# Altium PCB PCB.PcbDoc
Units mm, origin at the board's own origin, x right, y up, seen from the top; angles counter-clockwise.
Board outline 26.67 x 42.25 mm, 2 copper layers (Top Layer, Bottom Layer); 15 components, 30 nets, 111 pads, 44 vias.
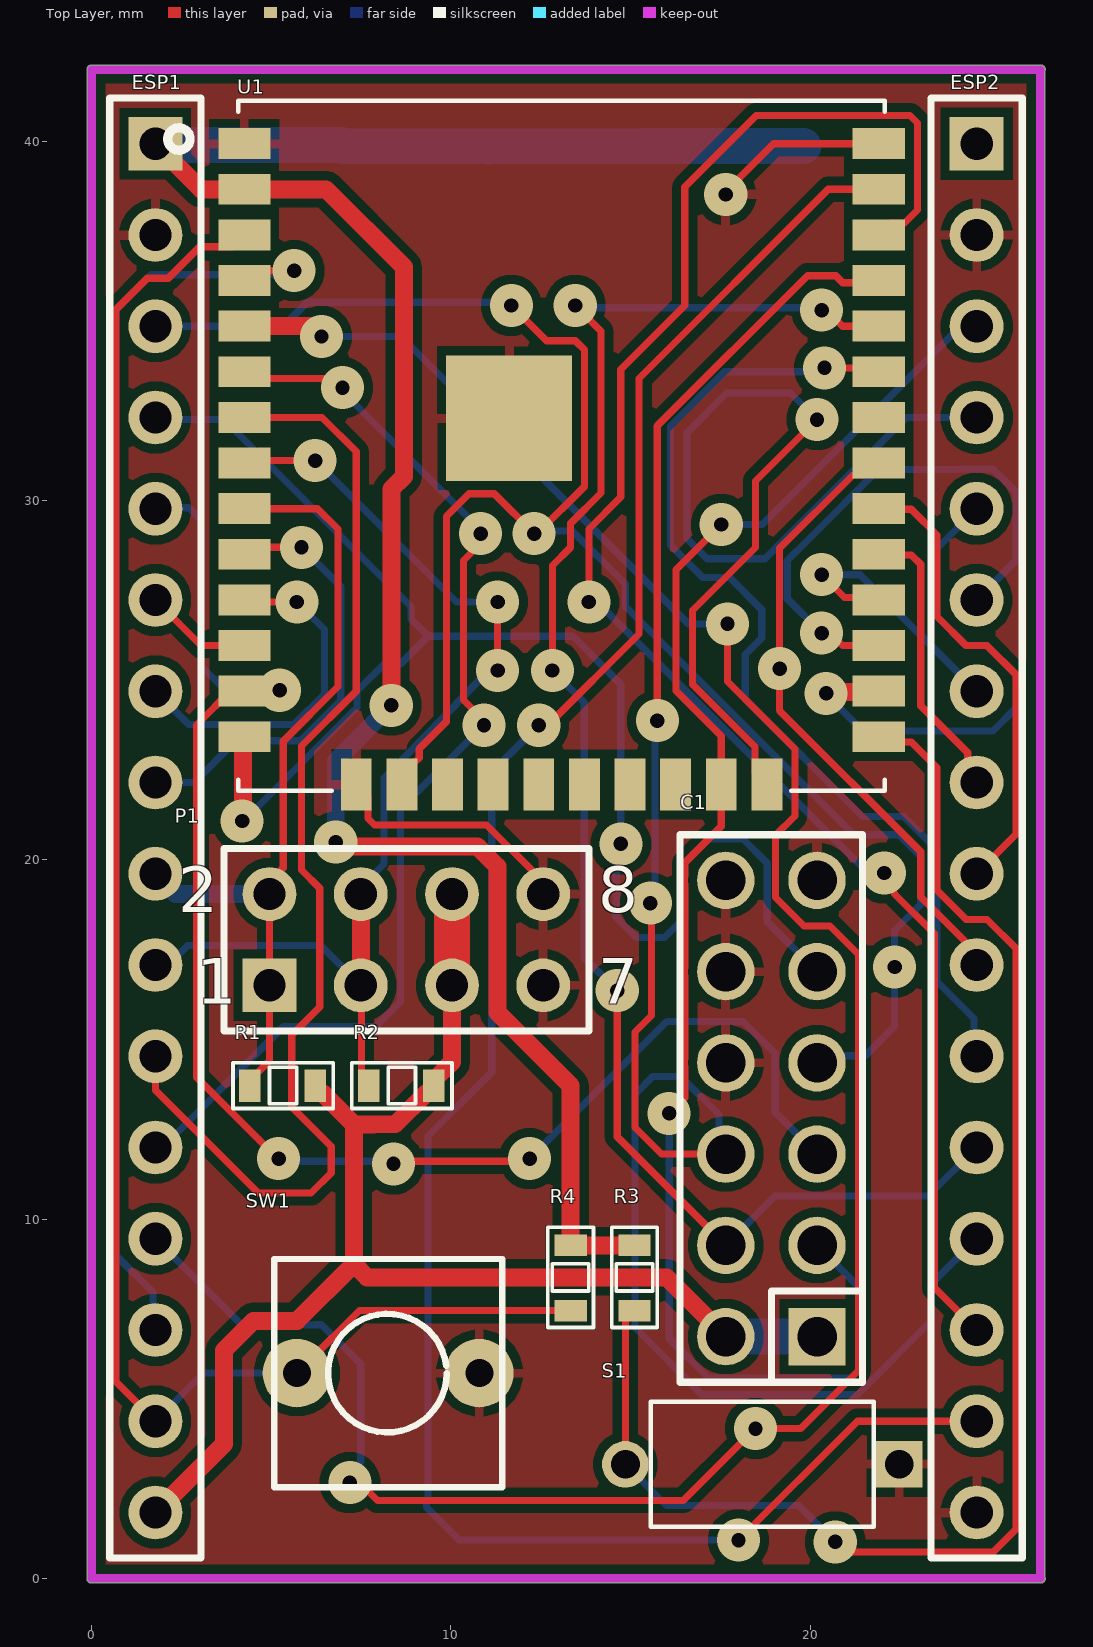
[diagram p0: Top Layer view]
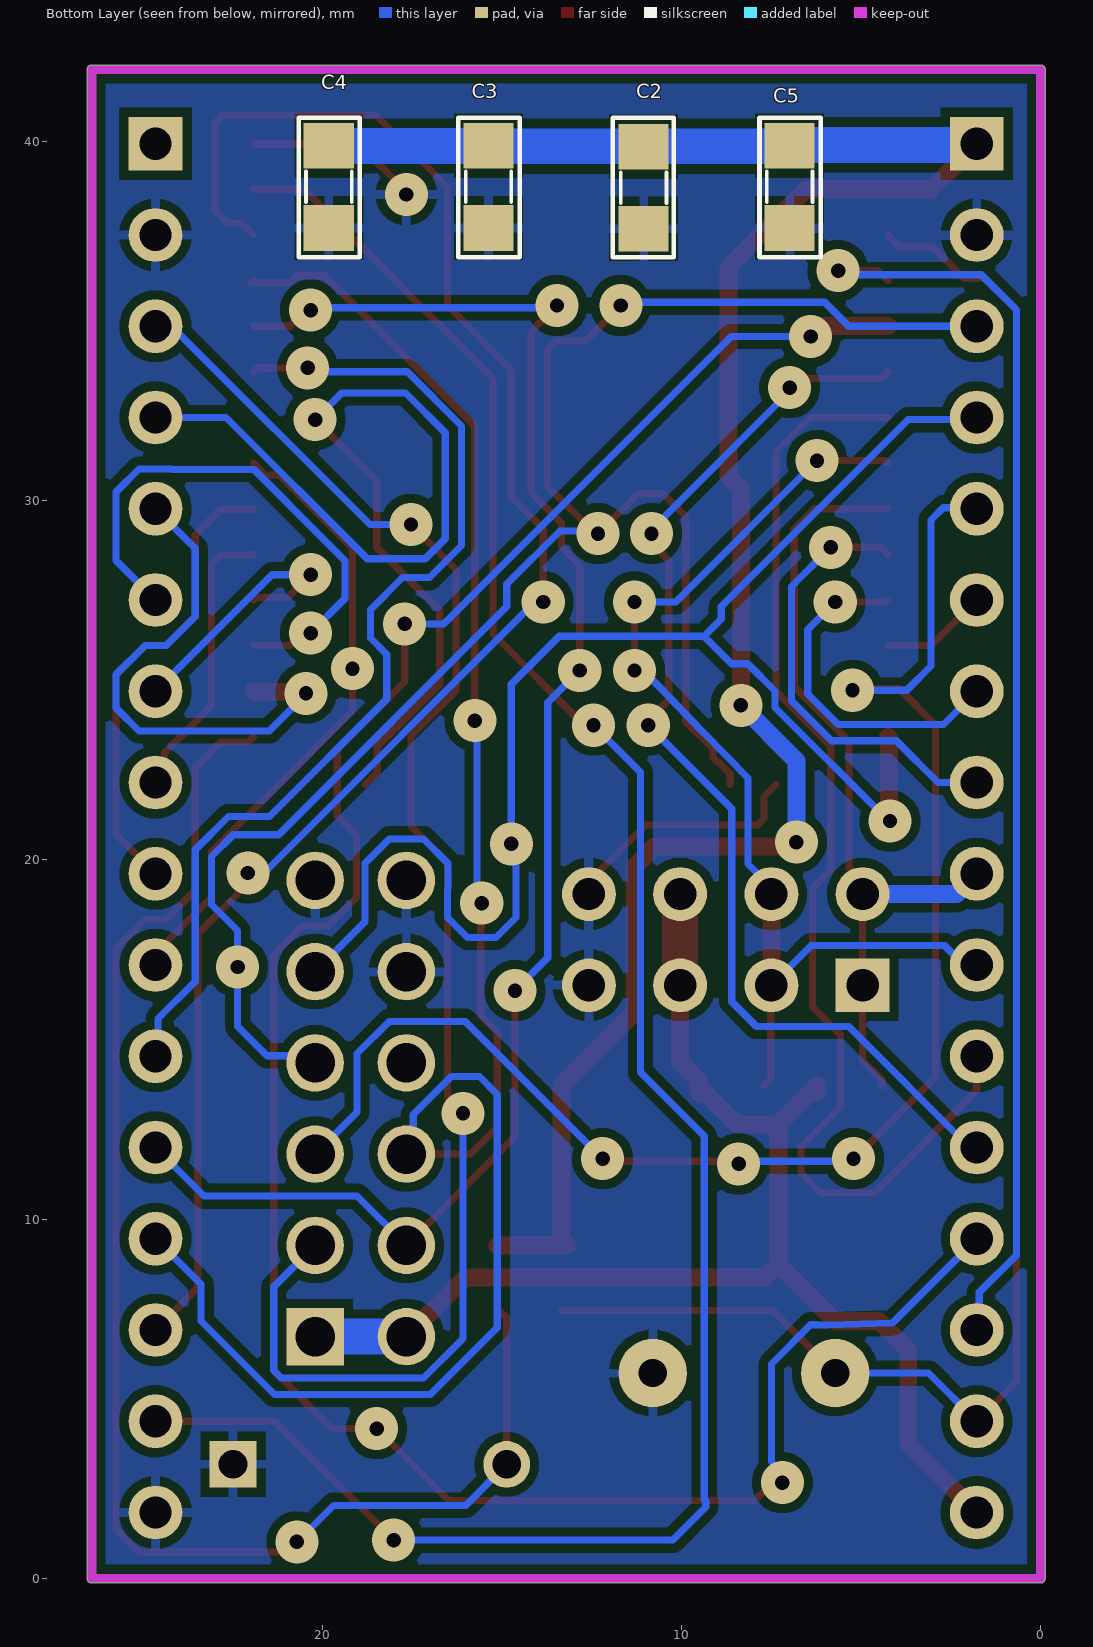
[diagram p1: Bottom Layer view, seen from below]
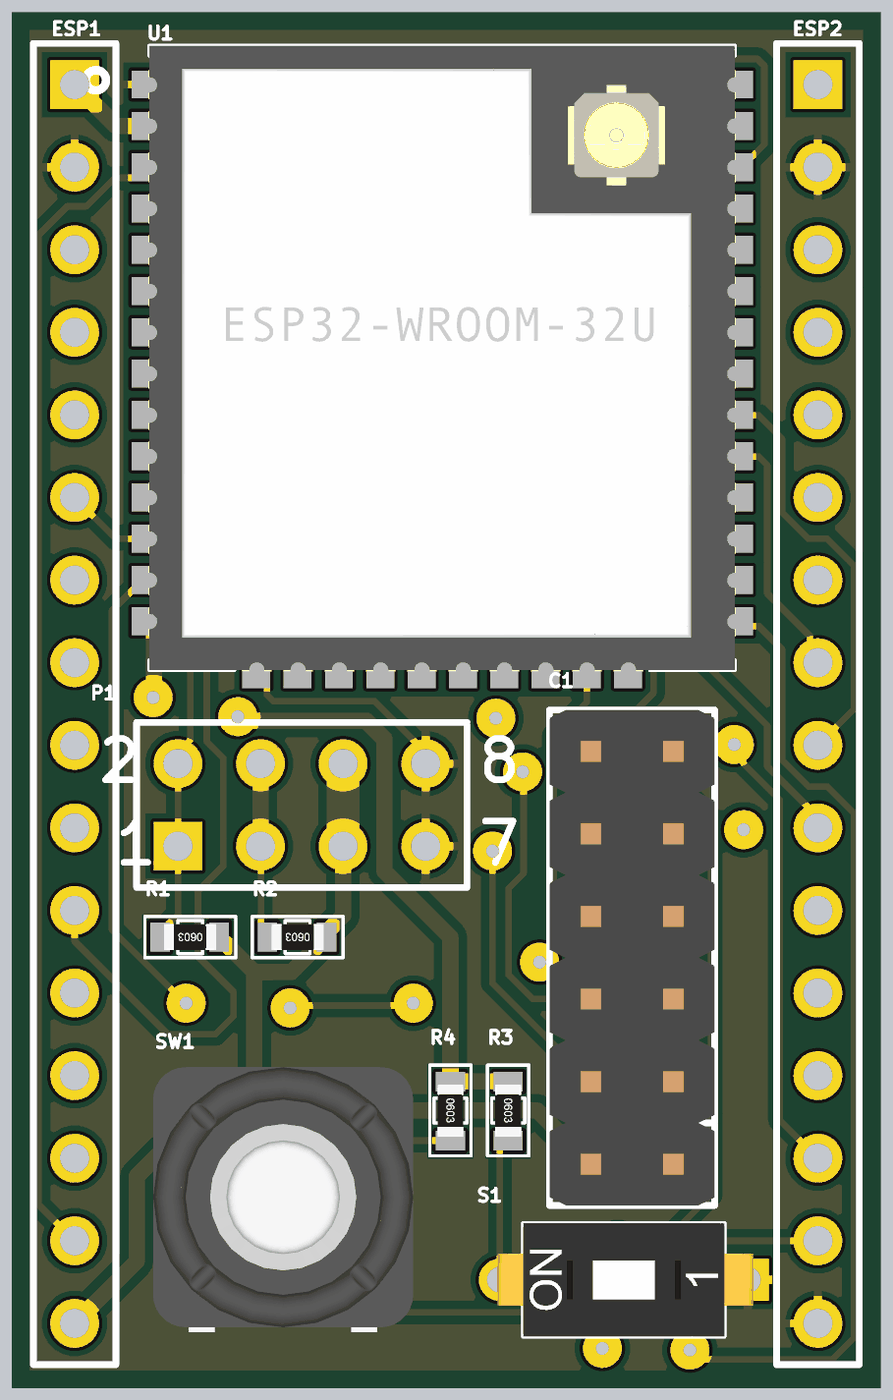
[diagram p2: 3D render of the assembled board from above, using the file's embedded part models]
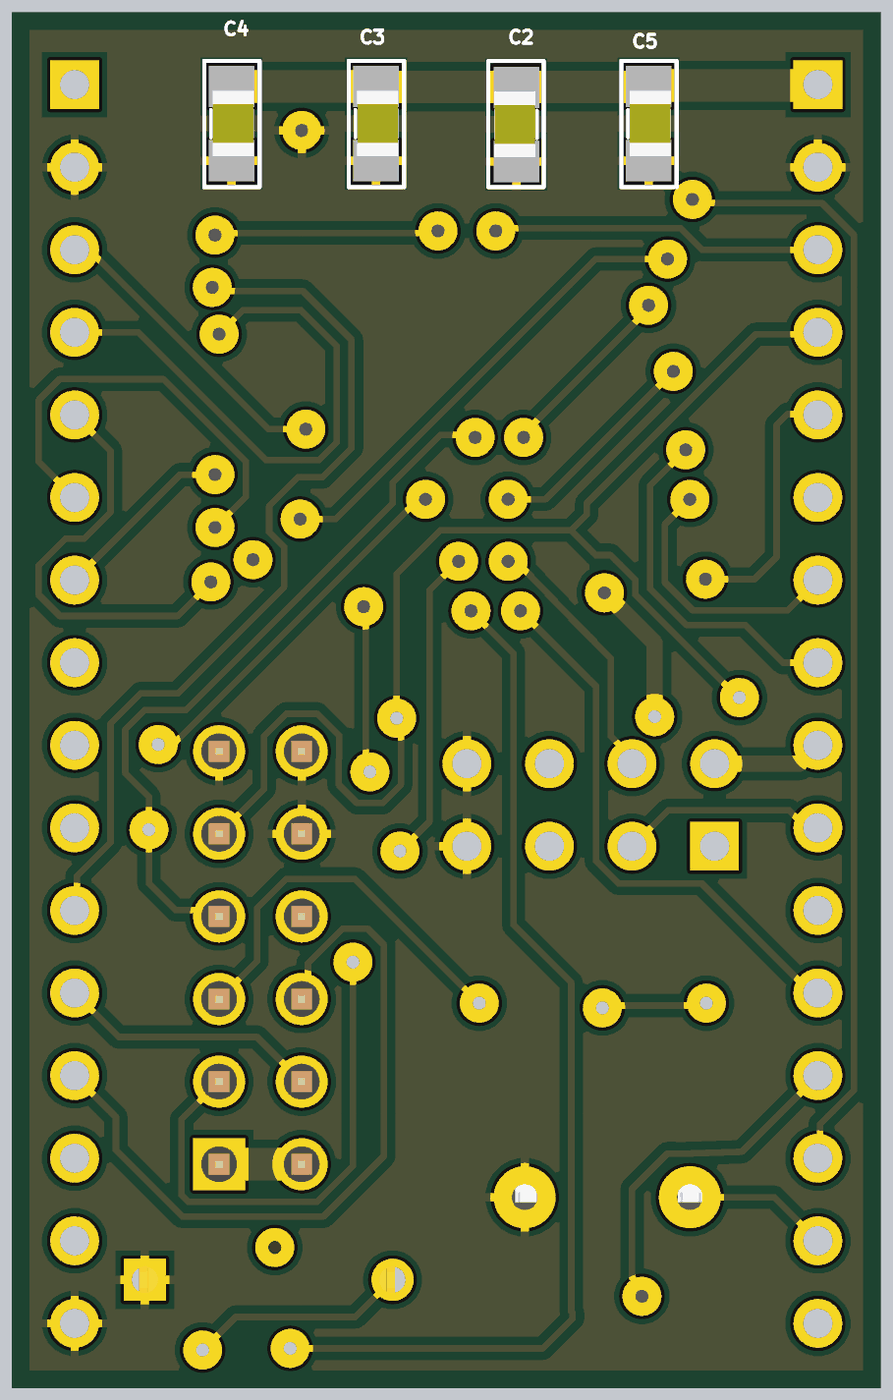
[diagram p3: 3D render of the assembled board from below, using the file's embedded part models]

## Layer stack, top to bottom
Top Solder: solder mask 0.0102, Solder Resist, Dk 3.5
Top Layer: signal copper 0.0356
Dielectric 1: dielectric 0.32, FR-4, Dk 4.8
Bottom Layer: signal copper 0.0356
Bottom Solder: solder mask 0.0102, Solder Resist, Dk 3.5

## Board outline
-0.127,0 ccw(c0,0) 0,-0.127 26.416,-0.127 ccw(c26.416,0) 26.543,0 ccw(c26.416,0) 26.539,0.032 26.539,41.968 ccw(c26.416,42) 26.543,42 ccw(c26.416,42) 26.416,42.127 0,42.127 ccw(c0,42) -0.127,42

## Design rules (kind name [scope] priority, off if disabled: settings)
Clearance [All] p1: gap=0.5 ignorepadtopadclearanceinfootprint=FALSE
PolygonConnect [All] p1: connectstyle=Relief reliefconductorwidth=0.254 reliefentries=4 polygonreliefangle="90 Angle" airgapwidth=0.254
RoutingVias [All] p1: holewidth=0.4 width=1.2 viastyle="Through Hole" minholewidth=0.4 minwidth=1.2 maxholewidth=0.4 maxwidth=1.2
SolderMaskExpansion [All] p1: expansion=0.102 istentingtop=FALSE
Width [All] p1: maxlimit=1 minlimit=0.2 preferedwidth=0.5
30 further rules are at their usual default settings.

## Components (designator, comment, footprint, x,y, rotation, side; value= is the part's Value field where it differs from the comment)
C1 "JP6x2" JP6-D2T 18.923,13.081 r90 top
C2 "103" SM-0805 11.049,38.71 r270 bottom
C3 "103" SM-0805 15.367,38.735 r90 bottom
C4 "103" SM-0805 19.812,38.735 r90 bottom
C5 "103" SM-0805 6.985,38.735 r90 bottom
ESP1 "Header 16" HDR1X16 1.777,39.935 r270 top
ESP2 "Header 16" HDR1X16 24.637,39.935 r270 top
P1 "Header 4X2" HDR2X4 4.953,16.51 r0 top
R1 "Res" RES-SMD-0603 5.334,13.716 r180 top
R2 "Res" RES-SMD-0603 8.636,13.716 r180 top
R3 "Res" RES-SMD-0603 15.113,8.382 r270 top
R4 "Res" RES-SMD-0603 13.335,8.382 r270 top
S1 "" SW-DIP1 18.669,3.175 r90 top
SW1 "SW" SW2 5.715,5.715 r0 top value="SW chip 2 pin"
U1 "ESP32-WROOM-32U" ESP32-WROOM-32U 13.081,31.528 r0 top

## Footprints (in the part's own frame and the unit in brackets; to place one, negate y for a bottom-side part, rotate by r counter-clockwise, add the part's x,y. Pads: shape width x height; smd on the part's side, far side on the other; paste and mask are expansions set on the pad)
ESP32-WROOM-32U [mm]
  rect 1.45x0.86 smd: 1(-8.83,8.41) 2(-8.83,7.14) 3(-8.83,5.87) 4(-8.83,4.6) 5(-8.83,3.33) 6(-8.83,2.06) 7(-8.83,0.79) 8(-8.83,-0.48) 9(-8.83,-1.75) 10(-8.83,-3.02) 11(-8.83,-4.29) 12(-8.83,-5.56) 13(-8.83,-6.83) 14(-8.83,-8.1) 25(8.83,-8.1) 26(8.83,-6.83) 27(8.83,-5.56) 28(8.83,-4.29) 29(8.83,-3.02) 30(8.83,-1.75) 31(8.83,-0.48) 32(8.83,0.79) 33(8.83,2.06) 34(8.83,3.33) 35(8.83,4.6) 36(8.83,5.87) 37(8.83,7.14) 38(8.83,8.41)
  rect 0.86x1.45 smd: 15(-5.715,-9.43) 16(-4.445,-9.43) 17(-3.175,-9.43) 18(-1.905,-9.43) 19(-0.635,-9.43) 20(0.635,-9.43) 21(1.905,-9.43) 22(3.175,-9.43) 23(4.445,-9.43) 24(5.715,-9.43)
  rect 3.5x3.5 smd: 39(-1.46,0.77)
  silkscreen extent -10.96,-9.6 9,9.6, body extent -9.03,-9.64 9.04,9.6, height 3.4
HDR1X16 [mm] "Connector; Header; 16 Position"
  rect 1.5x1.5 hole 0.9: 1(0,0)
  round 1.5 hole 0.9: 2(2.54,0) 3(5.08,0) 4(7.62,0) 5(10.16,0) 6(12.7,0) 7(15.24,0) 8(17.78,0) 9(20.32,0) 10(22.86,0) 11(25.4,0) 12(27.94,0) 13(30.48,0) 14(33.02,0) 15(35.56,0) 16(38.1,0)
  silkscreen extent -1.27,-1.27 39.37,1.27, body extent -1.27,-1.27 39.37,1.27, height 7
HDR2X4 [mm] "Connector; Header; 4x2 Position"
  rect 1.5x1.5 hole 0.9: 1(0,0)
  round 1.5 hole 0.9: 2(0,2.54) 3(2.54,0) 4(2.54,2.54) 5(5.08,0) 6(5.08,2.54) 7(7.62,0) 8(7.62,2.54)
  silkscreen extent -1.27,-1.27 8.89,3.81, body extent -1.27,-1.27 8.89,3.81, height 7
JP6-D2T [mm] "12 pins, dual pin, straight, gold plating"
  rect 1.6x1.6 hole 1.1: 1(-6.35,-1.27)
  round 1.6 hole 1.1: 2(-3.81,-1.27) 3(-1.27,-1.27) 4(1.27,-1.27) 5(3.81,-1.27) 6(6.35,-1.27) 7(6.35,1.27) 8(3.81,1.27) 9(1.27,1.27) 10(-1.27,1.27) 11(-3.81,1.27) 12(-6.35,1.27)
  silkscreen extent -7.62,-2.54 7.62,2.54, body extent -7.62,-2.54 7.62,2.54, height 8.55
RES-SMD-0603 [mm]
  rect 0.6x0.9 smd: 1(-0.889,0) 2(0.927,0)
  silkscreen extent -1.4,-0.64 1.4,0.64, body extent -0.8,-0.4 0.8,0.4, height 0.43
SM-0805 [mil] "Compoment SMD 80x50mil"
  rect 50x55 smd: 1(-45,0) 2(45,0)
  silkscreen extent -77,-34 76,33, body extent -40,-27 40,23, height 24
SW2 [mil] "SW button 2pin, 250x 250 mil"
  round 75 hole 31: 1(0,0) 2(200,0)
  silkscreen extent -25,-125 225,125, body extent -60,-163 255,157, height 257
SW-DIP1 [mm]
  rect 1.3x1.3 hole 0.8: 1(0,-3.81)
  round 1.3 hole 0.8: 2(0,3.81)
  silkscreen extent -1.74,-3.1 1.74,3.1, body extent -1.74,-3.98 1.74,3.89, height 3.95

## Part data
C1: "WR-PHD 2.54 mm Dual Socket Header", Manufacturer="W¨¹rth Elektronik eiSos GmbH", partNo=61301221821, ComponentLink1 Description=Manufacturer, ComponentLink1URL=http://www.we-online.com, ComponentLink2 Description=Datasheet, ComponentLink2URL=http://katalog.we-online.de/em/datasheet/6130xx21821.pdf, Created by="Karrer Zheng", Created Date="29 March 2013", NoPins=12
C2 C3 C4 C5: library part CM, "Cap SMD"
ESP1 ESP2: "Header, 16-Pin", LatestRevisionDate=17-Jul-2002, LatestRevisionNote="Re-released for DXP Platform.", Publisher="Altium Limited"
P1: "Header, 4-Pin, Dual row", LatestRevisionDate=17-Jul-2002, LatestRevisionNote="Re-released for DXP Platform.", Publisher="Altium Limited"
R1 R2 R3 R4: library part Res-SMD, "Resistor", Manufacturer="Generic Components", Class=Passive, Published=08/06/2000, Publisher="Altium Hobart Technology Centre"
S1: library part SWDIP1, "WS-DITV 2.54 mm small compact THT flat actuator with top tape", Manufacturer="Wurth Elektronik", Part No.=418127160901, ComponentLink1 Description=Manufacturer, ComponentLink1URL=http://www.we-online.com, ComponentLink2 Description=Datasheet, ComponentLink2URL=http://katalog.we-online.de/em/datasheet/4181271609xx.pdf, Created by="Baojun Chen", Created Date=Dec.2015, Pole=01
SW1: library part SW2, "Switch button 2 pin"
U1: "Wi-Fi/BT BLE Module ESP32-D0WD", MFR=Espressif, Category=MODULE, MPN=ESP32-WROOM-32U, PinCount=40, Price=None, Solder=SMT

## Via types
v1: diameter 1.2, hole 0.4, Top Layer to Bottom Layer, 44 vias

## Nets (pads, with @x,y where several pads share a name; then routed paths per layer and width w, separated by ;. In a path a pad name is that pad's centre, name@x,y a point inside that pad or via, vN(x,y) a via of type N, cw(c..) or ccw(c..) an arc to the next point about the centre after c; other vN are vias at no path point)
"Door1 sensor": ESP1.12 U1.6 | length 31.5
  Top Layer w0.2: U1.6 4.438,33.401 6.46,33.401 6.714,33.147 v1(6.985,33.147) ; v1(10.829,29.083) 10.829,28.812 10.349,28.332 10.349,24.449 10.922,23.876 v1(10.922,23.749)
  Bottom Layer w0.2: ESP1.12 1.976,11.995 5.348,15.367 7.911,15.367 8.597,16.053 8.597,21.424 v1(10.922,23.749) ; v1(6.985,33.147) 6.985,33.037 10.829,29.193 v1(10.829,29.083)
"Door2 sensor": ESP1.11 U1.7 | length 32.5
  Top Layer w0.2: ESP1.11 1.777,13.59 4.637,10.73 6.11,10.73 6.669,11.289 6.669,12.019 5.569,13.119 5.569,15.125 6.35,15.906 6.35,19.214 5.842,19.722 5.842,23.172 7.366,24.696 7.366,31.369 6.417,32.318 U1.7
GND: C1.6 C1.7 C1.8 C1.9 C2.2 C3.1 C4.1 C5.1 ESP1.2 ESP2.2 ESP2.16 P1.7 P1.8 S1.1 SW1.2 U1.1 U1.15 U1.38 U1.39 | length 11.9
  Top Layer w0.2: U1.15 7.696,21.768 7.696,21.153 7.874,20.975 10.994,20.975 12.573,19.396 P1.8 ; v1(17.653,38.524) 17.653,38.608 18.983,39.938 U1.38
"HSPI CLK": C1.3 ESP1.5 U1.13 | length 42.9
  Top Layer w0.2: v1(5.207,11.684) 5.188,11.684 2.921,13.951 2.921,23.754 3.932,24.765 5.192,24.765 v1(5.234,24.724) ; v1(8.405,11.538) 8.478,11.611 12.119,11.611 v1(12.192,11.684)
  Bottom Layer w0.2: ESP1.5 1.804,29.802 2.71,29.802 3.048,29.464 3.048,25.4 3.724,24.724 v1(5.234,24.724) ; v1(5.207,11.684) 5.28,11.611 8.332,11.611 v1(8.405,11.538) ; v1(12.192,11.684) 16.013,15.505 18.131,15.505 19.028,14.608 19.028,12.976 C1.3
"HSPI CS": C1.2 ESP2.3 U1.23 | length 43.5
  Top Layer w0.2: v1(16.078,12.945) 16.51,13.376 16.51,14.192 cw(c17.653,14.351) 16.51,14.51 16.51,16.732 cw(c17.653,16.891) 16.51,17.05 16.51,19.272 cw(c17.653,19.431) 16.51,19.59 16.51,19.92 17.526,20.936 U1.23 17.526,23.447 16.272,24.701 16.272,28.083 v1(17.526,29.337)
  Bottom Layer w0.2: v1(16.078,12.945) 16.078,6.674 17.175,5.577 21.14,5.577 21.347,5.784 21.347,8.117 C1.2 ; v1(17.526,29.337) 18.669,29.337 23.938,34.606 24.388,34.606 ESP2.3
"HSPI MISO": C1.5 ESP1.4 U1.14 | length 43.1
  Top Layer w0.5: v1(4.191,21.082) 4.221,21.112 4.221,23.398 U1.14
  Bottom Layer w0.2: ESP1.4 1.834,32.258 3.683,32.258 8.89,27.051 8.89,26.707 9.37,26.227 ; v1(4.191,21.082) 4.225,21.082 7.389,24.246 7.389,24.699 8.153,25.463 8.606,25.463 9.37,26.227 ; C1.5 18.807,18.277 18.807,19.909 18.131,20.585 17.175,20.585 16.499,19.909 16.499,19.202 16.51,19.191 16.51,18.401 15.951,17.842 15.161,17.842 14.602,18.401 14.602,20.317 v1(14.732,20.447) 14.732,24.892 13.397,26.227 9.37,26.227
"HSPI MOSI": C1.4 ESP1.3 U1.16 | length 52.2
  Top Layer w0.2: U1.16 8.636,22.393 8.966,22.723 9.005,22.723 9.122,22.84 9.122,23.092 9.875,23.845 9.875,29.56 10.509,30.194 11.208,30.194 v1(12.319,29.083) 12.407,29.083 13.725,30.401 13.725,34.195 13.466,34.454 12.663,34.454 v1(11.684,35.433)
  Bottom Layer w0.2: ESP1.3 5.337,34.855 6.006,35.523 11.594,35.523 v1(11.684,35.433) ; v1(12.319,29.083) 12.394,29.158 13.38,29.158 14.859,27.679 14.859,27.051 21.209,20.701 22.472,20.701 23.079,20.094 23.079,18.761 22.352,18.034 v1(22.352,17.018) 22.352,15.367 21.533,14.548 20.39,14.548 C1.4
"I2C SCL": ESP1.10 P1.3 P1.4 R2.2 U1.8 | length 30.4
  Top Layer w0.2: U1.8 4.318,31.115 v1(6.223,31.115) ; P1.3 7.509,16.494 7.509,13.916 R2.2 ; v1(11.303,25.273) v1(11.303,27.181)
  Top Layer w0.5: P1.3 P1.4
  Bottom Layer w0.2: ESP1.10 2.129,17.075 2.668,17.614 6.389,17.614 P1.3 ; v1(6.223,31.115) 10.157,27.181 v1(11.303,27.181) ; P1.4 7.493,19.235 8.143,19.885 8.143,22.284 9.372,23.531 ccw(c8.693,24.2) 9.381,23.54 10.932,25.156 11.049,25.273 v1(11.303,25.273)
"I2C SDA": ESP1.9 P1.1 P1.2 R1.2 U1.9 | length 22.8
  Top Layer w0.2: U1.9 6.29,29.778 6.858,29.21 6.858,24.83 5.334,23.306 5.334,19.783 4.953,19.402 P1.1 4.953,14.412 4.407,13.866 R1.2
  Bottom Layer w0.5: ESP1.9 2.342,19.05 P1.2
IO0: R3.2 S1.2 U1.25 | length 41
  Top Layer w0.2: S1.2 14.859,7.255 15.059,7.455 R3.2 ; v1(20.701,1.016) 20.986,0.731 25.094,0.731 25.741,1.378 25.741,17.532 24.928,18.345 24.346,18.345 23.533,19.158 23.533,22.568 22.819,23.282 22.057,23.282 U1.25
  Bottom Layer w0.2: S1.2 16.002,2.032 19.685,2.032 v1(20.701,1.016)
IO16: ESP2.6 U1.27 | length 15.3
  Top Layer w0.2: v1(20.32,26.314) 20.553,26.314 20.899,25.968 U1.27
  Bottom Layer w0.2: v1(20.32,26.314) 19.366,27.268 19.366,28.335 19.925,28.894 21.903,30.872 24.173,30.872 24.18,30.879 25.094,30.879 25.741,30.232 25.741,28.339 ESP2.6
IO17: ESP2.7 U1.28 | length 7.5
  Top Layer w0.2: v1(20.32,27.94) 20.956,27.304 21.845,27.304 U1.28
  Bottom Layer w0.2: v1(20.32,27.94) 21.392,27.94 ESP2.7
"IR Sensor": ESP1.13 U1.5 | length 66.5
  Top Layer w0.2: v1(7.188,2.667) 7.459,2.667 7.955,2.171 16.471,2.171 18.469,4.169 19.732,4.169 21.347,5.784 21.347,17.369 20.555,18.161 19.831,18.161 19.039,18.953 19.039,20.685 19.58,21.226 19.58,23.085 17.701,24.964 v1(17.701,26.571)
  Top Layer w0.5: U1.5 6.112,34.858 v1(6.401,34.569)
  Bottom Layer w0.2: ESP1.13 4.061,7.171 4.12,7.112 5.933,7.054 ccw(c5.962,8.008) 5.981,7.054 6.237,7.059 6.403,7.059 7.493,5.969 7.493,3.242 7.188,2.938 v1(7.188,2.667) ; v1(6.401,34.569) 8.611,34.569 16.609,26.571 v1(17.701,26.571)
  other v1: 18.482,4.169
"keycard input": ESP1.14 U1.4 | length 36
  Top Layer w0.2: U1.4 4.526,36.403 v1(5.636,36.403)
  Bottom Layer w0.2: ESP1.14 1.706,6.986 1.706,7.965 0.673,8.998 0.673,35.312 1.652,36.291 5.524,36.291 v1(5.636,36.403) v1@5.888,36.403
"LAN CRS DV": ESP1.6 U1.12 | length 3
  Top Layer w0.2: ESP1.6 3.044,25.968 U1.12
"LAN MDC": ESP2.15 U1.37 | length 59.9
  Top Layer w0.2: v1(12.446,23.749) 12.7,23.749 15.24,26.289 15.24,33.401 20.507,38.668 U1.37 ; v1(18.009,1.067) 21.317,4.375 ESP2.15
  Bottom Layer w0.2: v1(12.446,23.749) 11.137,22.44 11.137,14.089 9.362,12.315 9.362,2.194 9.319,2.15 9.319,1.984 10.236,1.067 v1(18.009,1.067)
"LAN MDIO": ESP2.9 U1.30 | length 13.1
  Top Layer w0.2: U1.30 21.93,29.759 22.819,29.759 23.533,29.045 23.533,26.778 24.346,25.965 24.928,25.965 25.741,25.152 25.741,20.719 ESP2.9
"LAN RXD0": ESP1.8 U1.10 | length 12.5
  Top Layer w0.2: U1.10 4.445,28.702 v1(5.842,28.702)
  Bottom Layer w0.2: ESP1.8 2.855,22.155 4.016,23.316 5.817,23.316 6.935,24.434 6.935,27.609 v1(5.842,28.702)
"LAN RXD1": ESP1.7 U1.11 | length 9.8
  Top Layer w0.2: U1.11 4.311,27.178 v1(5.715,27.178)
  Bottom Layer w0.2: ESP1.7 2.702,23.77 5.629,23.77 6.481,24.622 6.481,26.412 v1(5.715,27.178)
"LAN TX EN": ESP2.11 U1.33 | length 29.1
  Top Layer w0.2: v1(20.403,33.697) 21.802,33.697 U1.33
  Bottom Layer w0.2: v1(20.403,33.697) 20.294,33.588 17.624,33.588 16.118,32.082 16.118,28.754 16.177,28.695 17.012,27.86 17.761,27.86 18.655,26.967 18.655,26.176 18.198,25.719 18.198,24.474 21.463,21.209 22.606,21.209 23.533,20.282 23.533,16.618 24.566,15.585 24.566,14.606 ESP2.11
"LAN TXD0": ESP2.10 U1.31 | length 17.6
  Top Layer w0.2: U1.31 21.581,30.718 21.195,30.718 19.152,28.674 v1(19.152,25.324) 19.152,24.155 23.079,20.228 23.079,18.97 24.637,17.412 ESP2.10
"LAN TXD1": ESP2.14 U1.36 | length 49
  Top Layer w0.2: v1(13.843,27.178) 13.843,29.21 14.732,30.099 14.732,33.655 16.51,35.433 16.51,38.73 18.502,40.722 22.783,40.722 22.99,40.515 22.99,38.091 22.627,37.728 22.241,37.728 U1.36 ; v1(22.066,19.638) 22.066,19.367 22.354,19.079 22.354,19.053 23.463,17.944 23.463,8.089 ESP2.14
  Bottom Layer w0.2: v1(13.843,27.178) 14.078,27.178 21.52,19.736 ccw(c21.655,19.779) 21.526,19.722 21.551,19.696 21.597,19.65 ccw(c21.655,19.779) 21.654,19.638 v1(22.066,19.638)
"LED IND": ESP2.5 U1.26 | length 14.7
  Top Layer w0.5: v1(20.447,24.638) 20.477,24.668 21.881,24.668 U1.26
  Bottom Layer w0.2: v1(20.447,24.638) 20.447,24.613 21.469,23.591 25.094,23.591 25.741,24.238 25.741,25.152 24.928,25.965 24.346,25.965 23.533,26.778 23.533,28.671 ESP2.5
"UART RX": ESP2.8 U1.29 | length 8
  Top Layer w0.2: U1.29 21.93,28.489 22.819,28.489 23.079,28.229 23.079,24.292 24.388,22.983 24.388,22.404 ESP2.8
"UART RX0": C1.11 ESP2.12 U1.34 | length 45.8
  Top Layer w0.2: v1(12.827,25.273) 12.827,28.194 13.335,28.702 13.335,29.369 14.179,30.213 14.179,34.716 v1(13.462,35.433) ; v1(14.631,16.362) 14.631,12.293 C1.11 ; v1(20.32,35.306) 20.451,35.306 20.899,34.858 U1.34
  Bottom Layer w0.2: v1(12.827,25.273) 13.716,24.384 13.716,17.277 v1(14.631,16.362) ; v1(13.462,35.433) 13.525,35.369 20.256,35.369 v1(20.32,35.306) ; C1.11 19.025,10.643 23.285,10.643 ESP2.12
"UART TX": ESP2.4 U1.24 | length 29.7
  Top Layer w0.2: U1.24 18.466,22.428 18.466,23.149 16.726,24.889 16.726,26.946 18.48,28.7 18.48,30.545 v1(20.193,32.258)
  Bottom Layer w0.2: v1(20.193,32.258) 19.454,32.997 17.676,32.997 16.572,31.894 16.572,28.942 17.131,28.383 18.742,28.383 22.674,32.315 ESP2.4
"UART TX0": C1.10 ESP2.13 U1.35 | length 54.3
  Top Layer w0.2: v1(15.556,18.796) 15.585,18.767 15.585,15.672 15.124,15.211 15.124,12.549 15.863,11.811 C1.10 ; v1(15.748,23.876) 15.748,32.083 19.925,36.26 20.715,36.26 20.907,36.068 21.971,36.068 U1.35
  Bottom Layer w0.2: v1@15.556,18.604 v1(15.556,18.796) 15.686,18.926 15.686,23.814 v1(15.748,23.876) ; C1.10 17.461,12.003 17.461,12.911 16.402,13.97 15.621,13.97 15.124,13.473 15.124,6.986 16.987,5.123 21.328,5.123 23.368,7.163 23.368,8.186 ESP2.13
"VCC 3.3V": C2.1 C3.2 C4.2 C5.2 ESP1.1 R3.1 R4.1 U1.2 | length 61.4
  Top Layer w0.5: ESP1.1 3.044,38.668 U1.2 6.528,38.668 8.693,36.503 8.693,30.673 8.343,30.323 v1(8.343,24.304) ; v1(6.796,20.495) 6.919,20.371 10.744,20.371 11.303,19.812 11.303,15.748 13.335,13.716 13.335,9.321 13.235,9.321 13.185,9.271 R3.1
  Bottom Layer w0.5: v1(6.796,20.495) 6.796,22.757 v1(8.343,24.304)
  Bottom Layer w1: ESP1.1 1.805,39.906 6.957,39.906 C5.2 6.998,39.865 11.036,39.865 C2.1 11.062,39.865 15.354,39.865 C3.2 C4.2
"VCC 5V": C1.1 C1.12 ESP1.16 P1.5 P1.6 R1.1 R2.1 | length 37.4
  Top Layer w0.5: ESP1.16 3.683,3.741 3.683,6.35 4.504,7.171 5.72,7.171 7.301,8.752 ; R1.1 6.223,13.566 6.273,13.516 6.423,13.516 7.301,12.638 ; P1.5 10.033,14.374 9.525,13.866 9.525,13.566 9.475,13.516 9.325,13.516 8.451,12.642 7.849,12.642 7.846,12.638 7.301,12.638 ; C1.12 16.002,8.382 7.671,8.382 7.301,8.752 ; 7.301,8.752 7.301,12.638
  Top Layer w1: P1.5 P1.6
  Bottom Layer w1: C1.12 C1.1
"WIFI EN": ESP1.15 R4.2 SW1.1 U1.3 | length 49
  Top Layer w0.2: ESP1.15 0.673,5.479 0.673,35.312 1.551,36.19 2.133,36.19 3.011,37.068 3.921,37.068 U1.3 ; SW1.1 SW1.1@5.962,5.962 ; SW1.1@5.715,6.21 SW1.1@5.962,5.962 ; R4.2 7.455,7.455 SW1.1@5.962,5.962
  Bottom Layer w0.2: ESP1.15 3.117,5.715 SW1.1
pads on no net: ESP2.1 U1.17 U1.18 U1.19 U1.20 U1.21 U1.22 U1.32

## Polygon pours and split planes (outlines as drawn)
GND on Bottom Layer "GND_L02_P000" (solid, pour order 0): 0,0 26.416,0 26.416,42.037 0,42.037
GND on Top Layer "GND_L01_P001" (solid, pour order 1): 0,0 26.416,0 26.416,42.037 0,42.037

## Keep-outs
Keep-Out Layer:
  lines w0.254: 26.412,0 26.412,42 ; 26.416,0 0,0 0,42 26.416,42

## Text inside footprints (layer, text, board x,y; h text height)
P1: Top Overlay "8" at 14.097,18.542 h1.27; Top Overlay "7" at 14.097,16.002 h1.27; Top Overlay "1" at 2.921,16.002 h1.27; Top Overlay "2" at 2.413,18.542 h1.27